# Altium PCB FPGA3 Panel.PcbDoc
Units mil, origin at the board's own origin, x right, y up, seen from the top; angles counter-clockwise.
Board outline 5000 x 9500 mil, 12 copper layers (TopLayer, Plane1, MidLayer1, Plane2, MidLayer2, Plane3, Plane4, MidLayer3, Plane5, MidLayer4, Plane6, BottomLayer), stack 58.89 mil thick; 8 components, 0 nets, 80 pads, 0 vias.
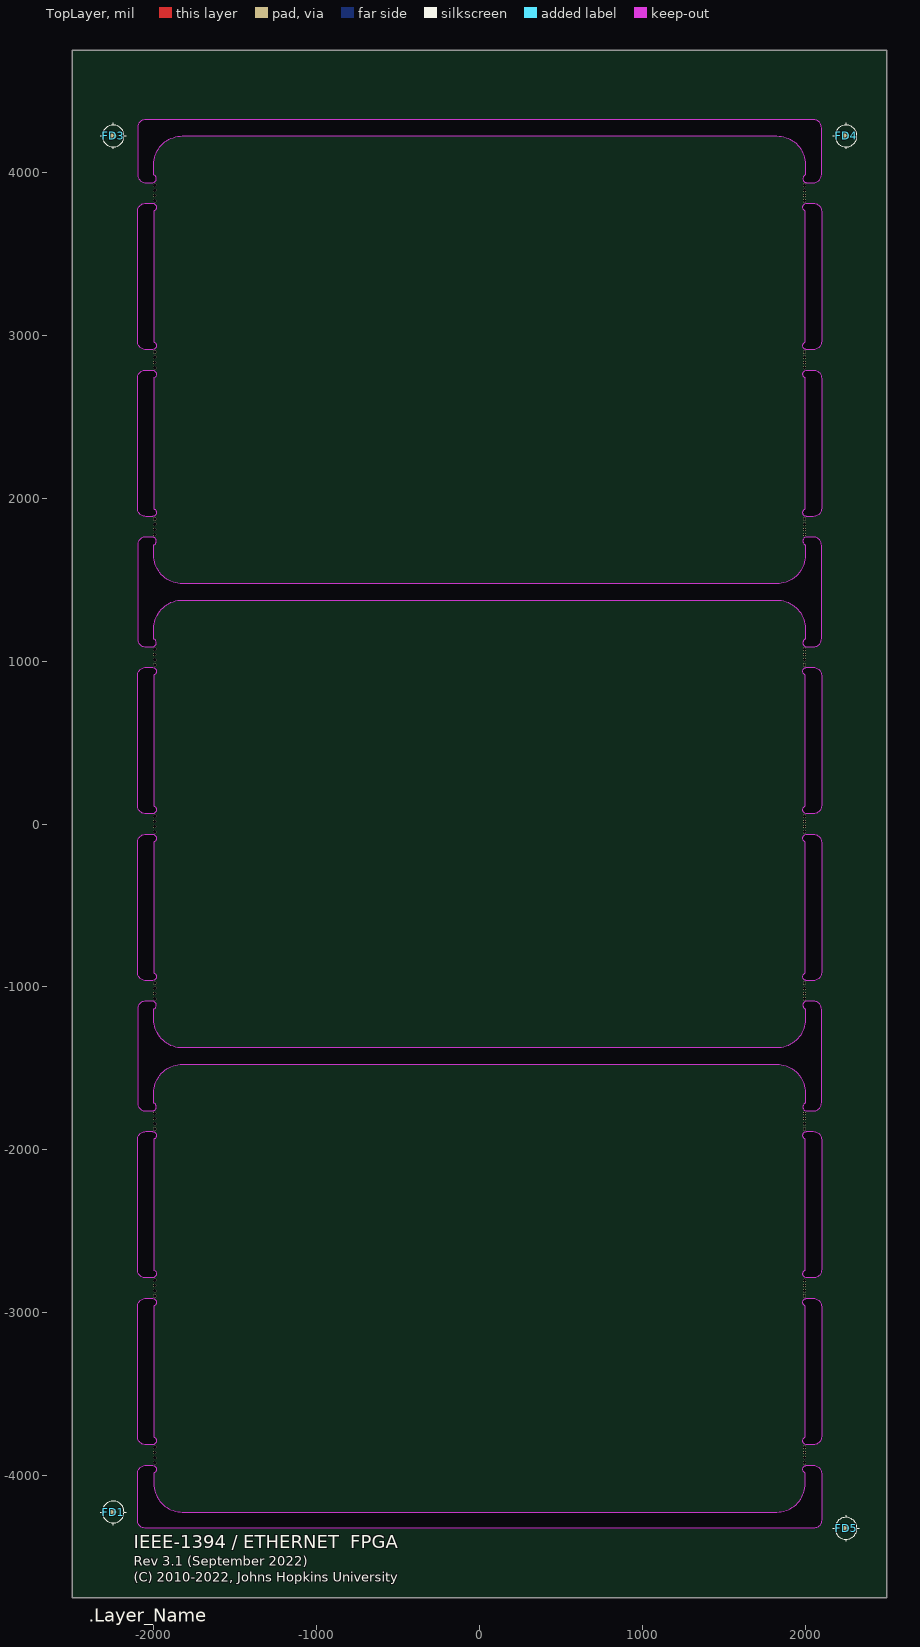
[diagram p0: TopLayer view]
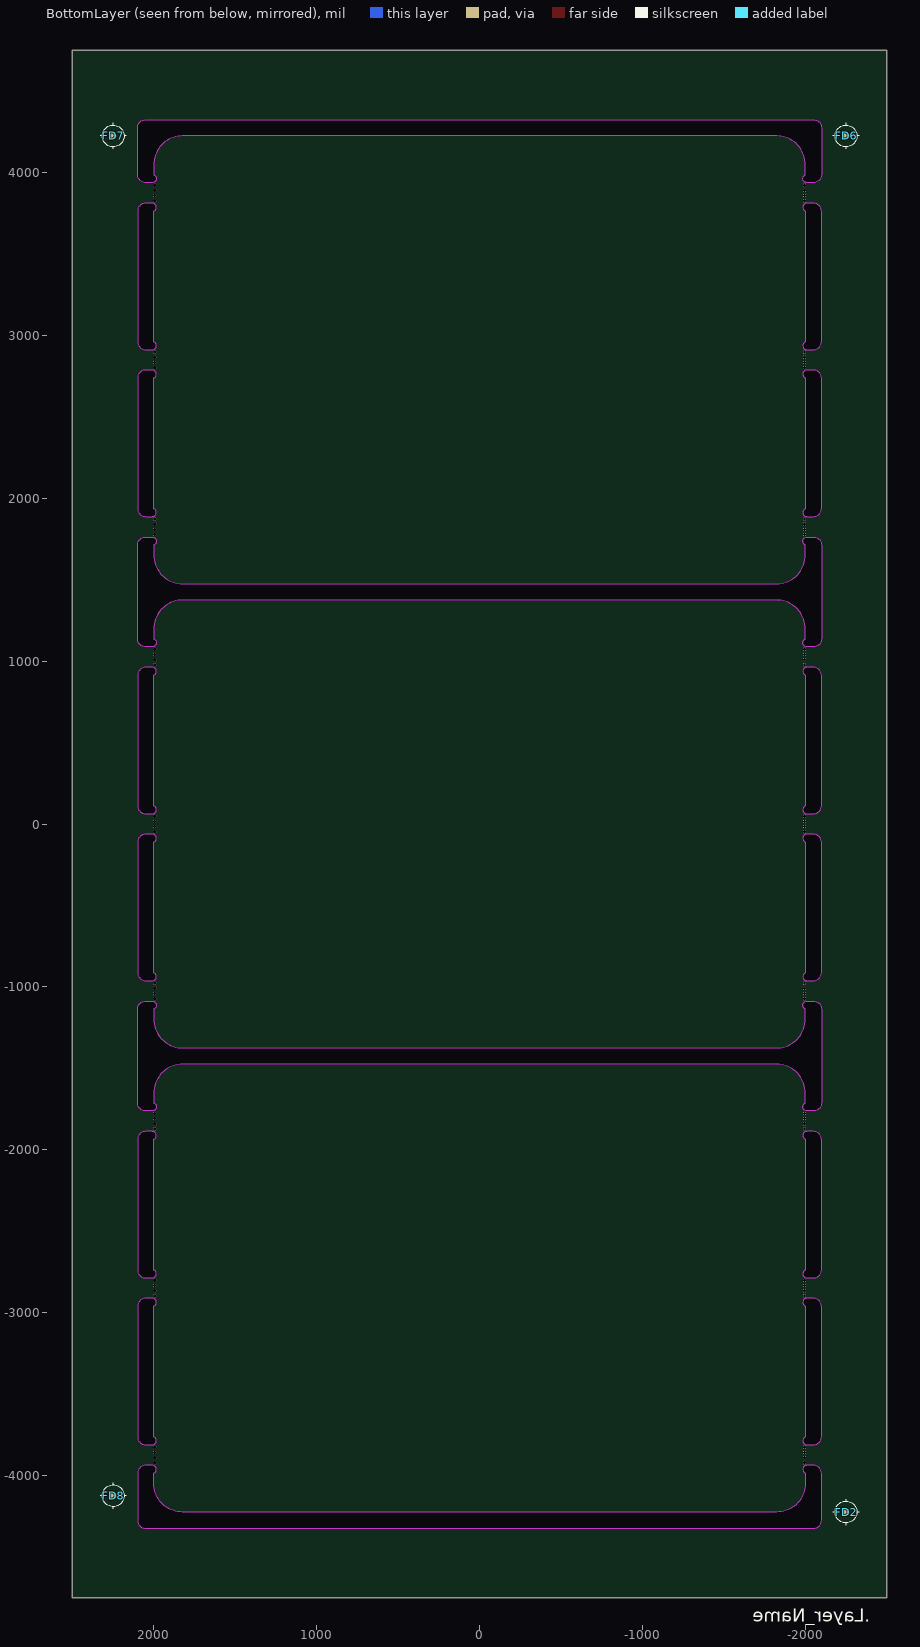
[diagram p1: BottomLayer view, seen from below]
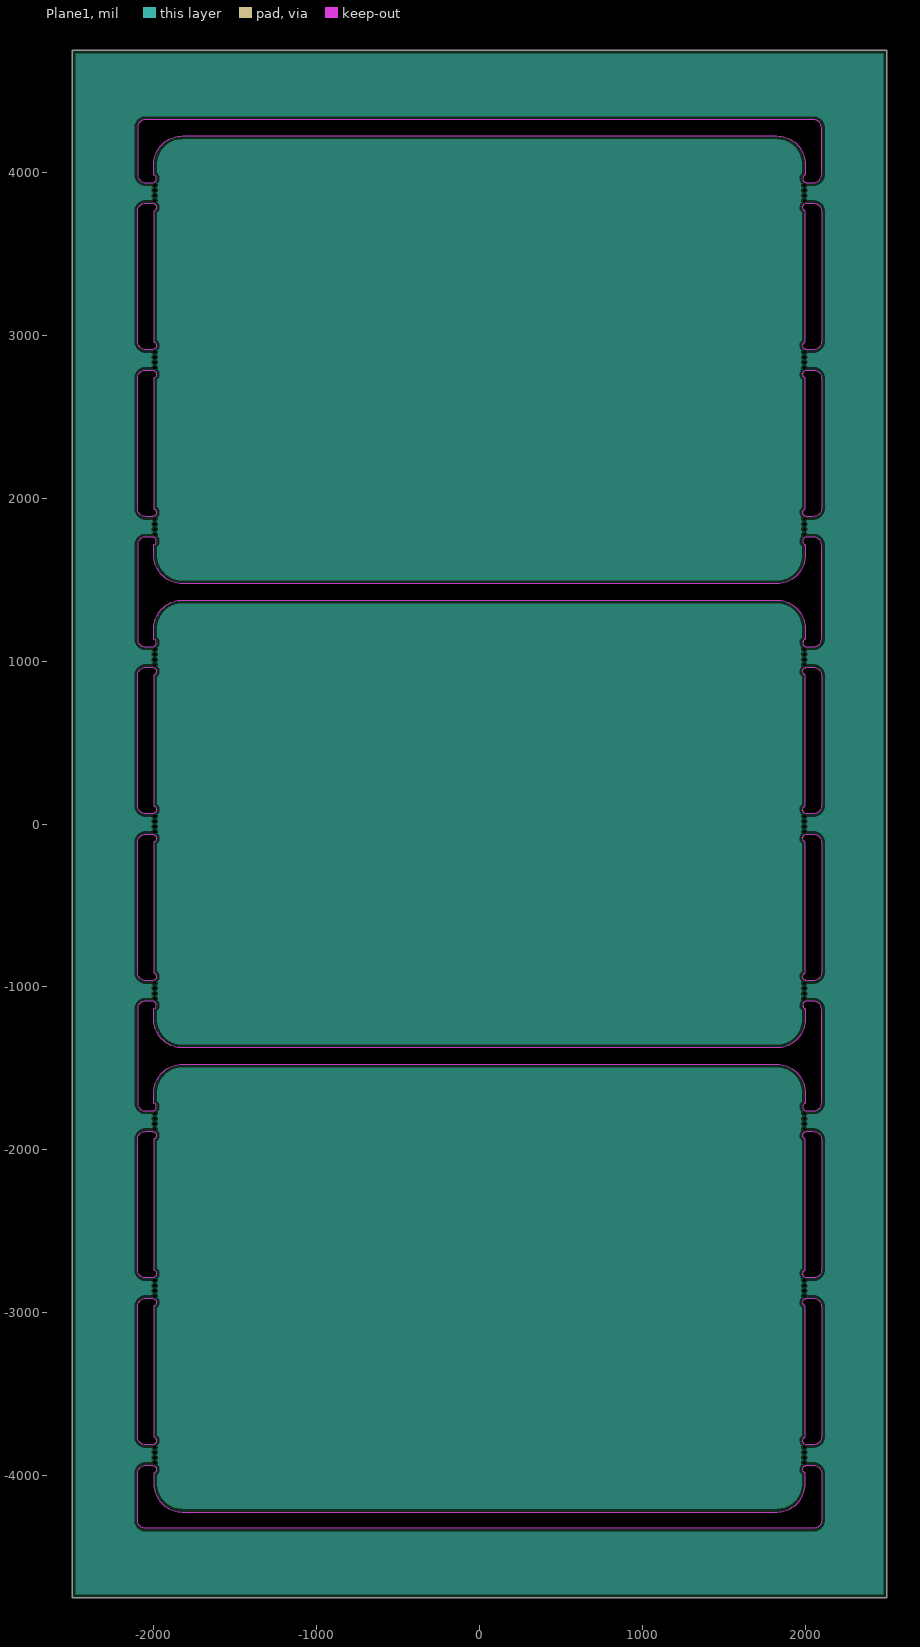
[diagram p2: Plane1, clearances drawn from the general rule]
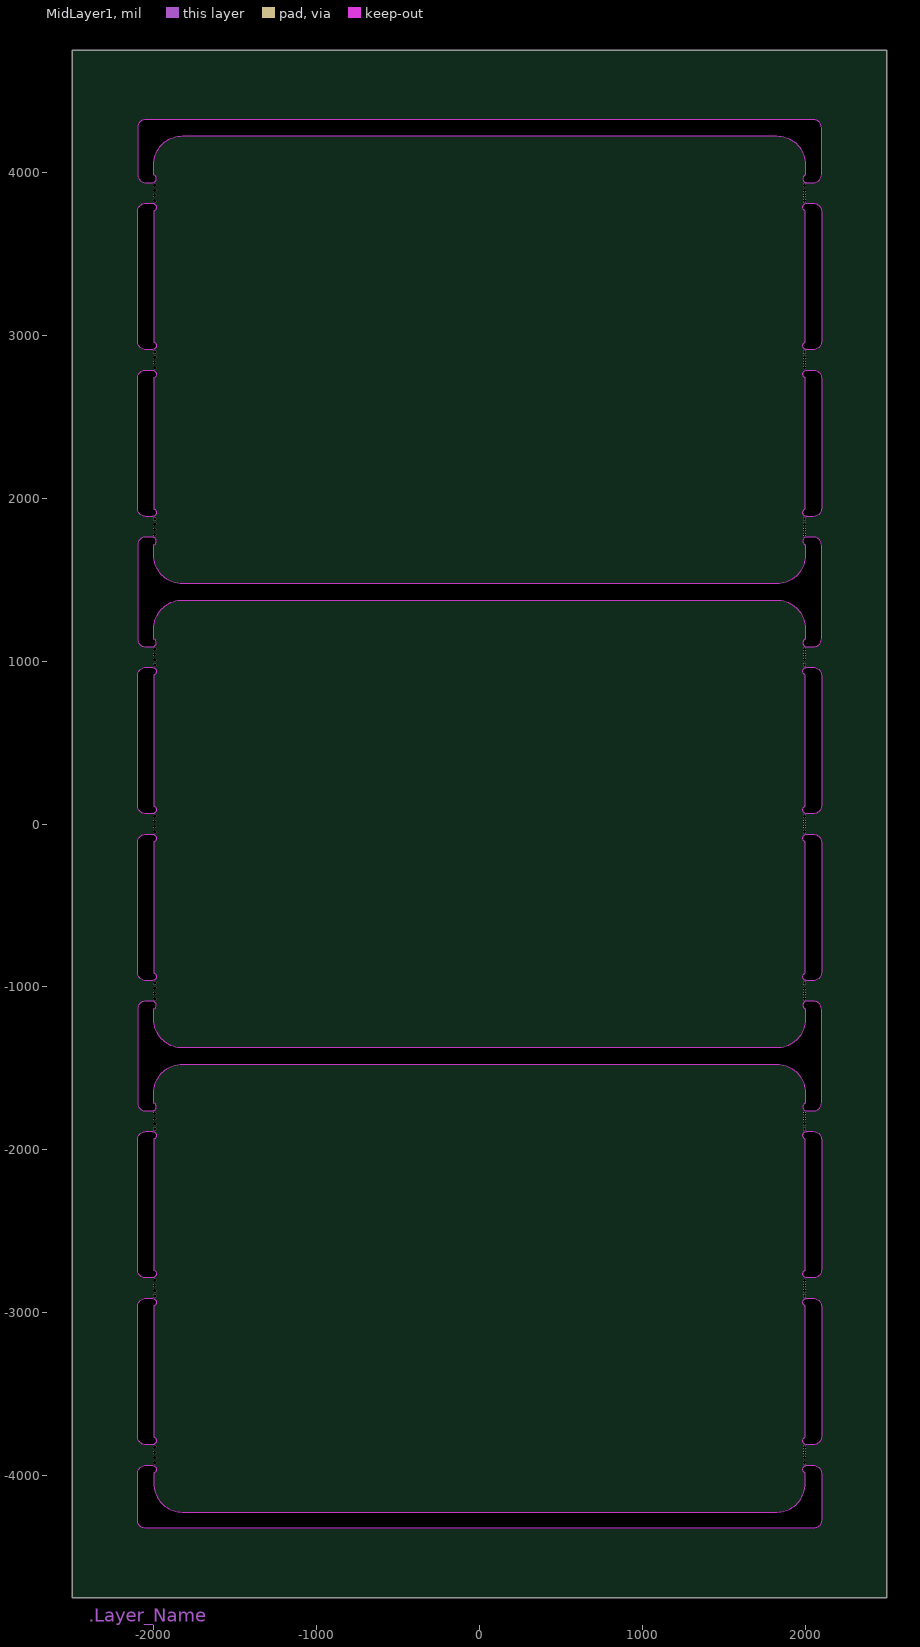
[diagram p3: MidLayer1]
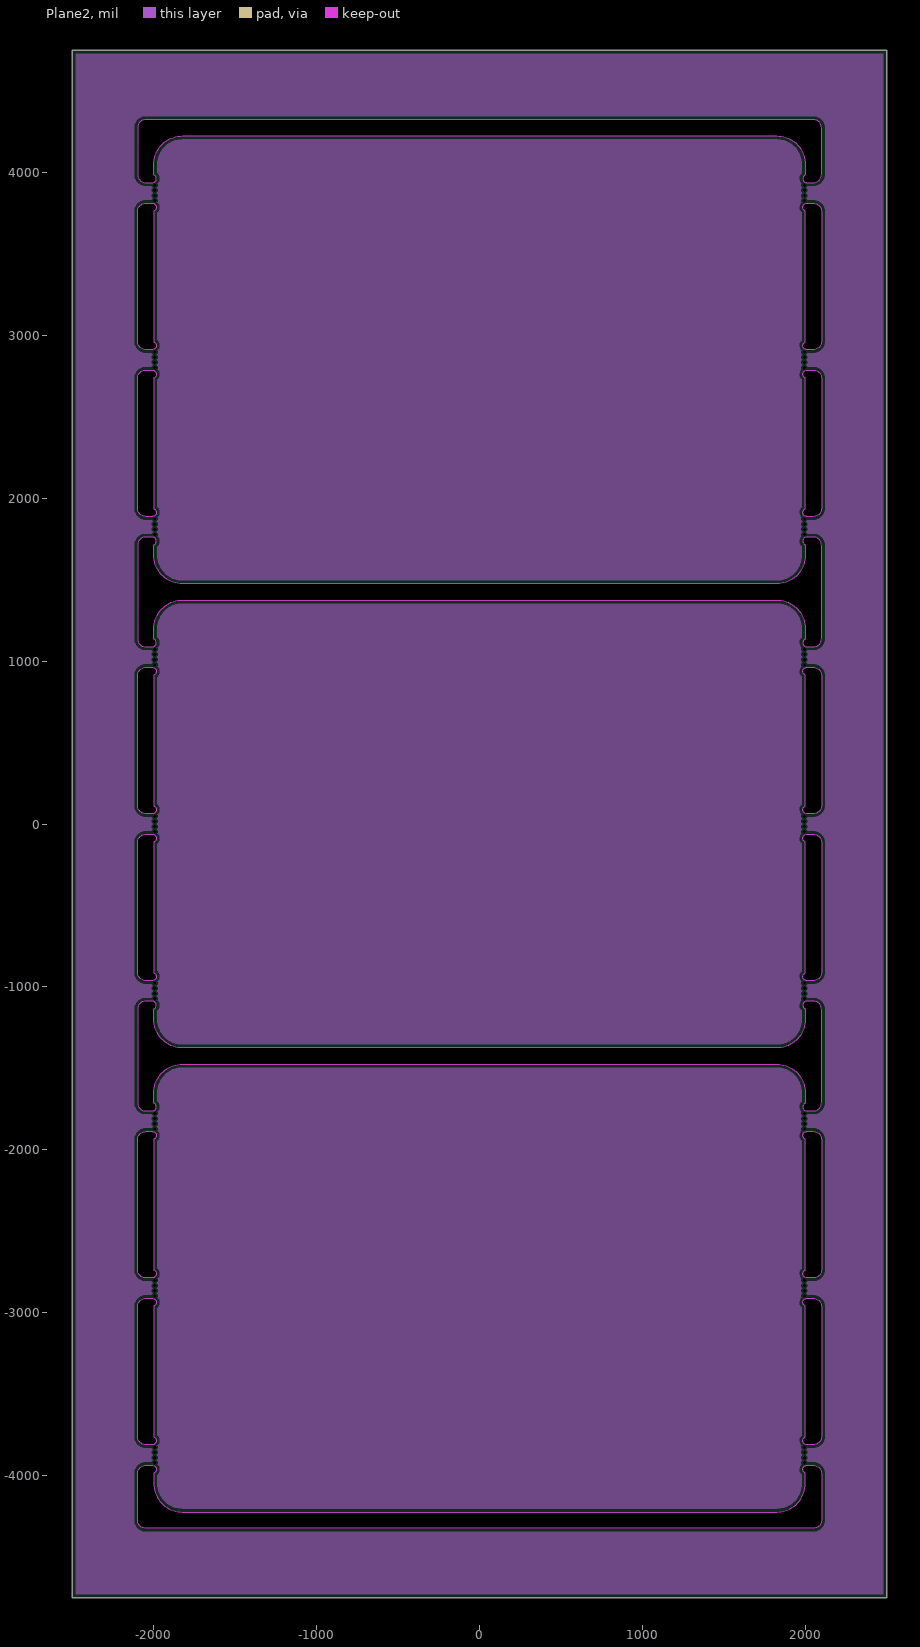
[diagram p4: Plane2, clearances drawn from the general rule]
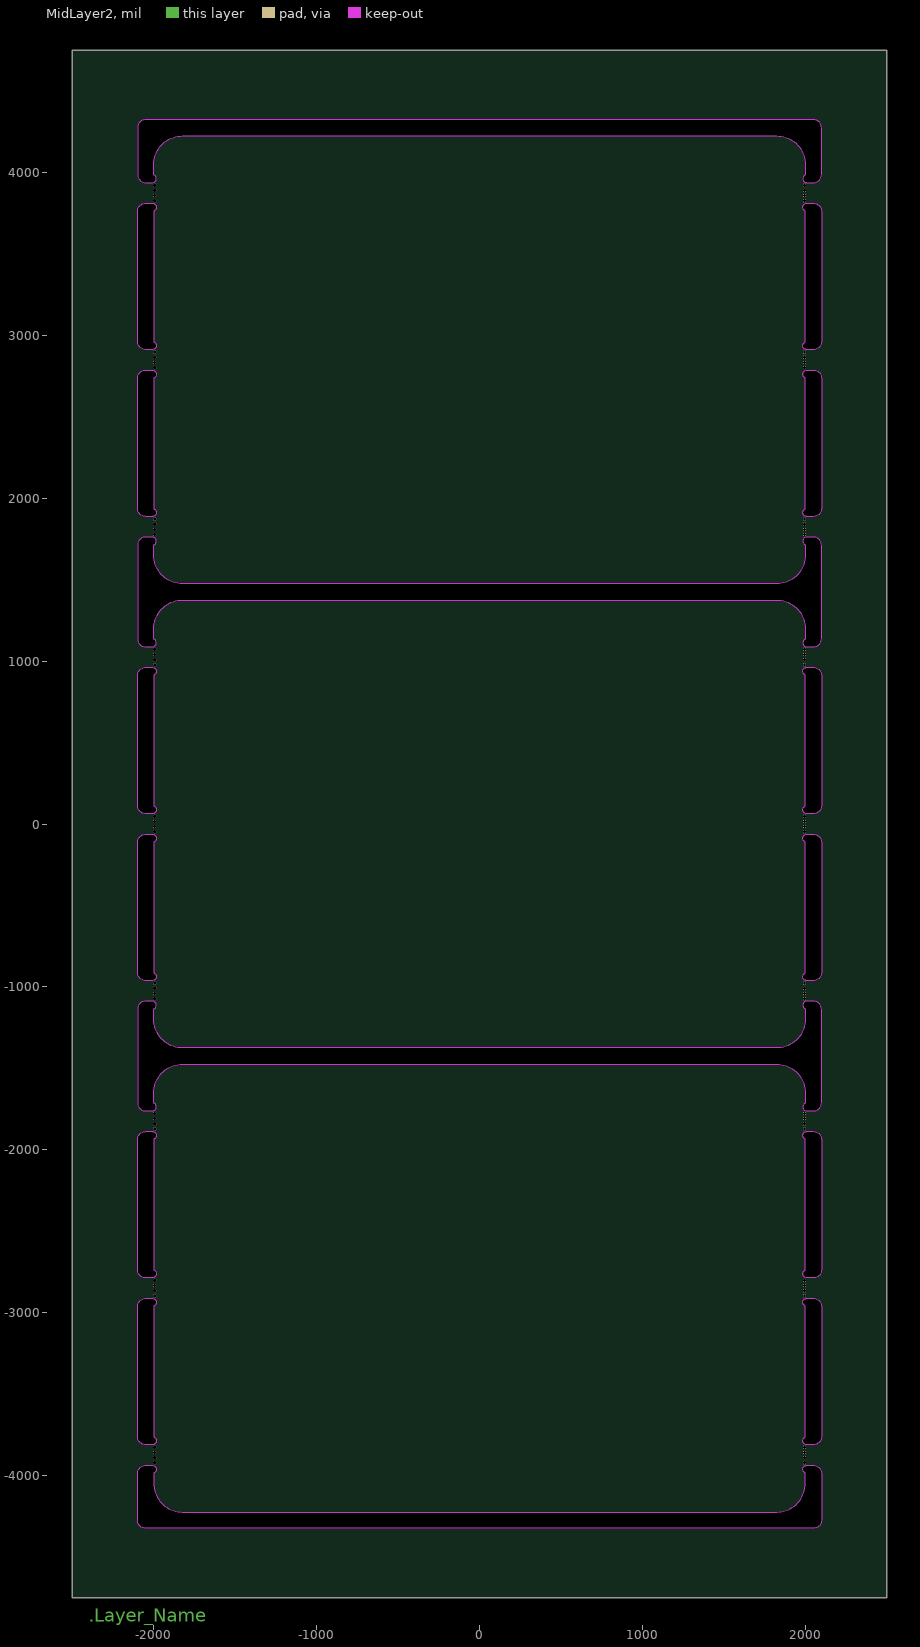
[diagram p5: MidLayer2]
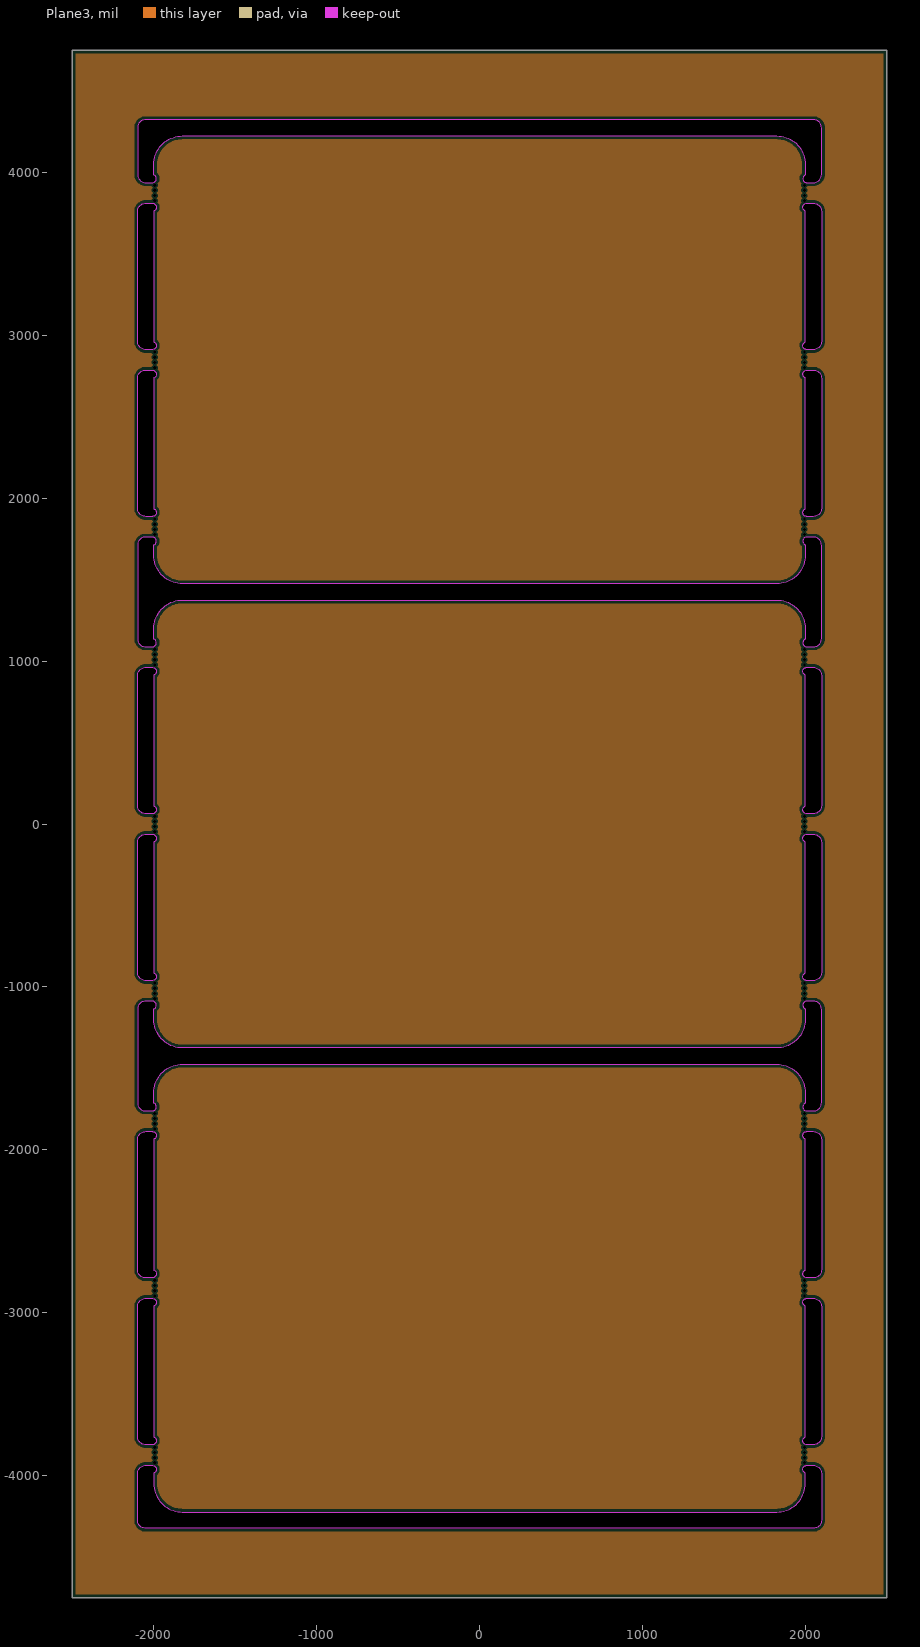
[diagram p6: Plane3, clearances drawn from the general rule]
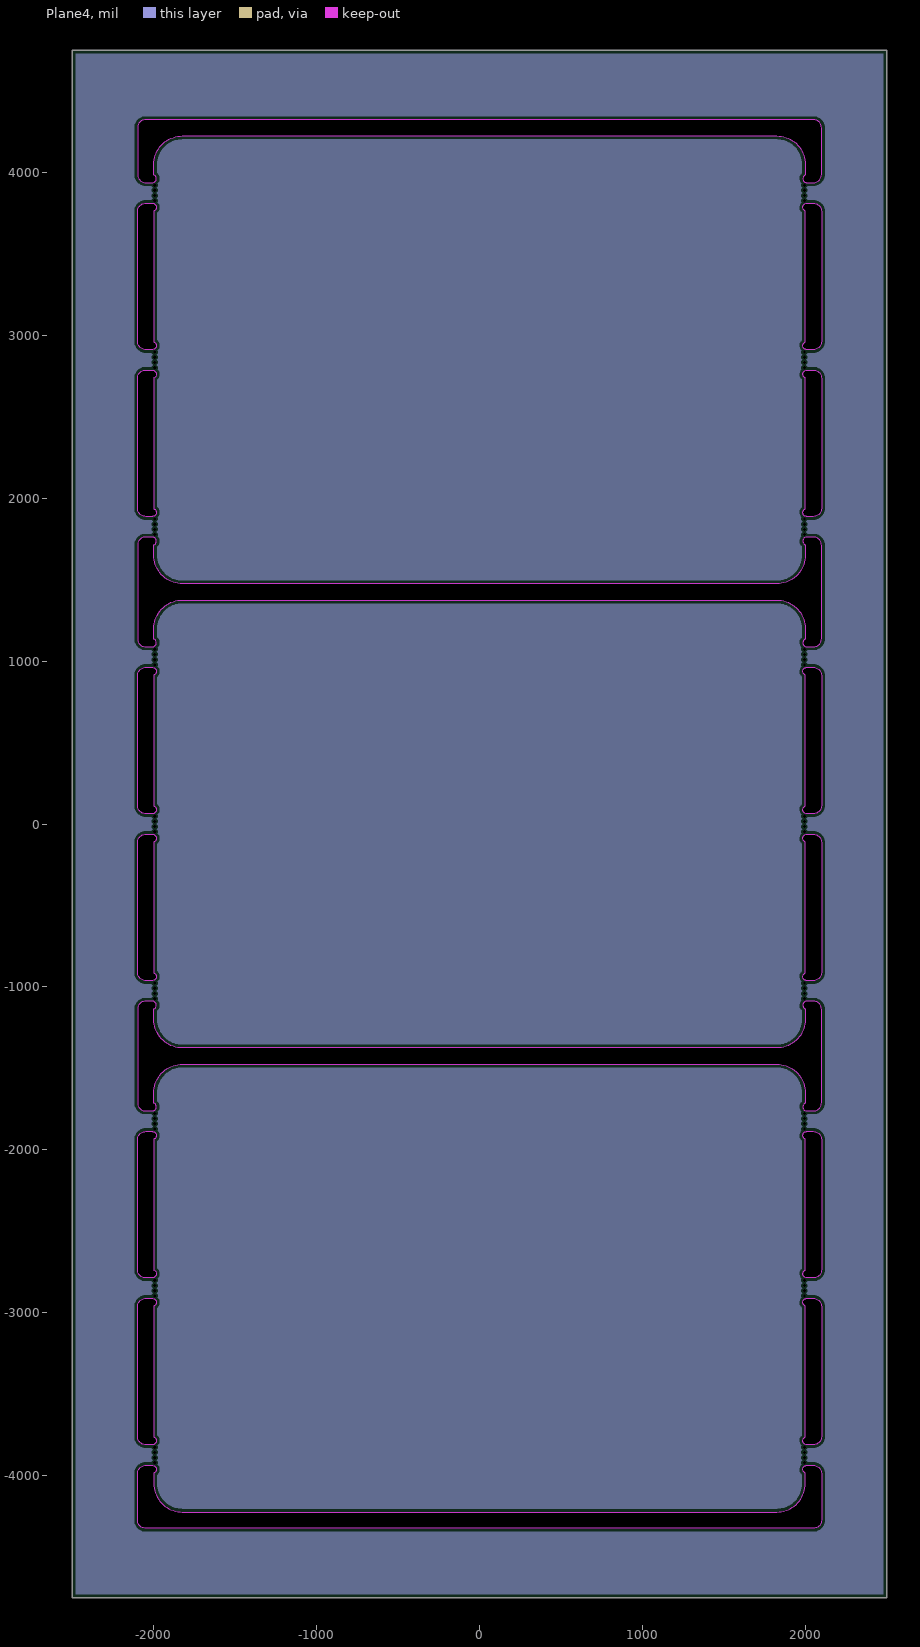
[diagram p7: Plane4, clearances drawn from the general rule]
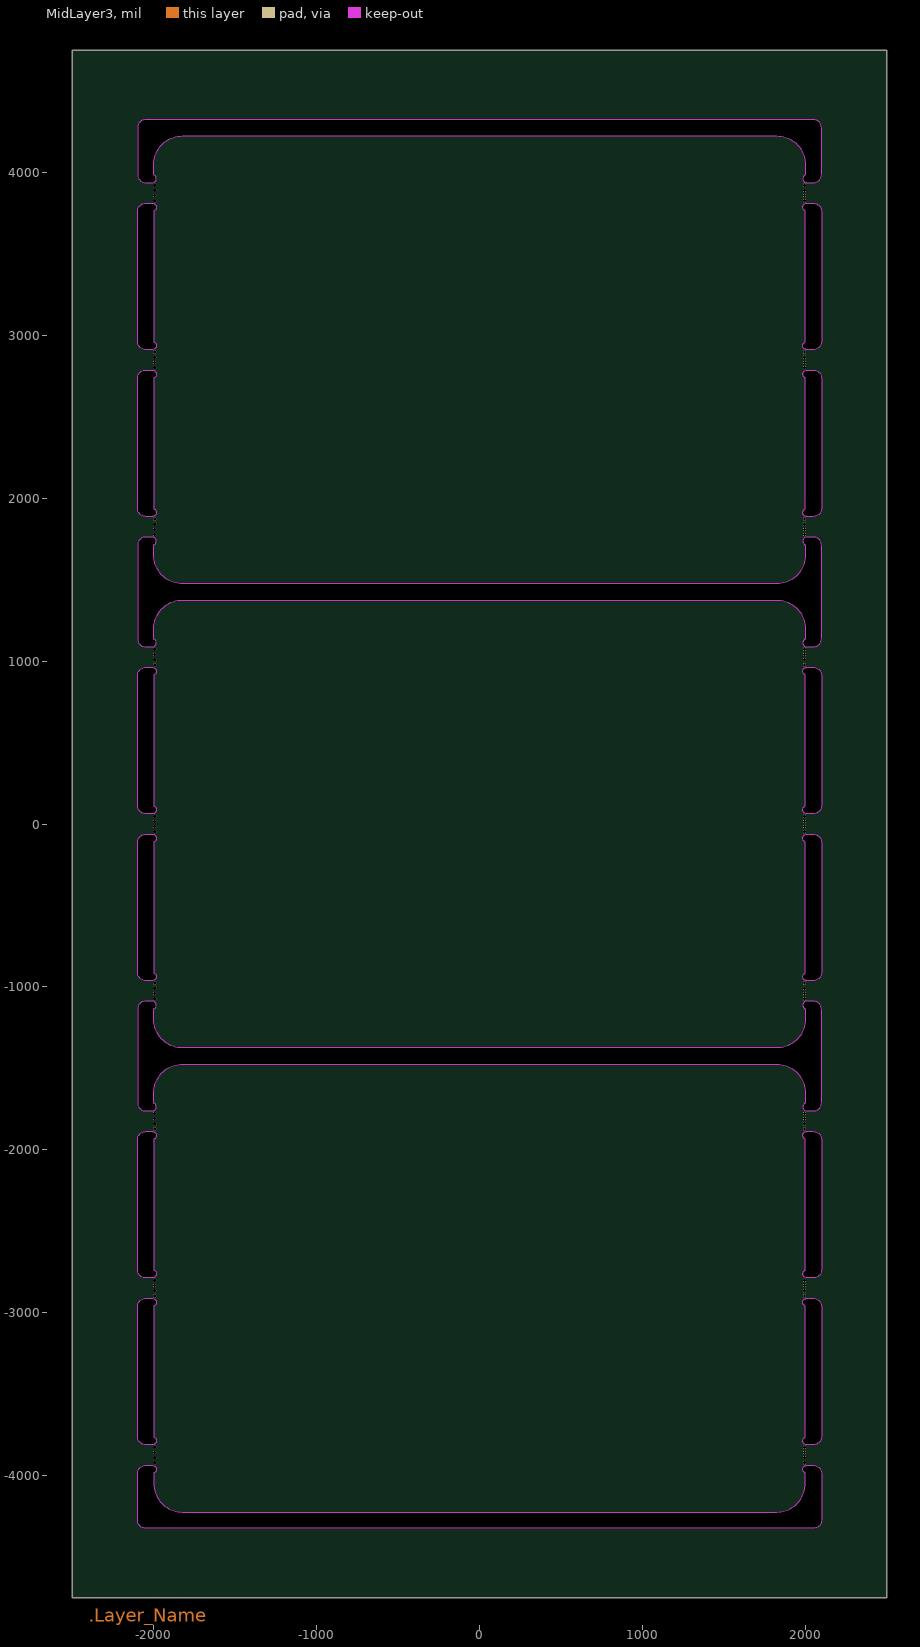
[diagram p8: MidLayer3]
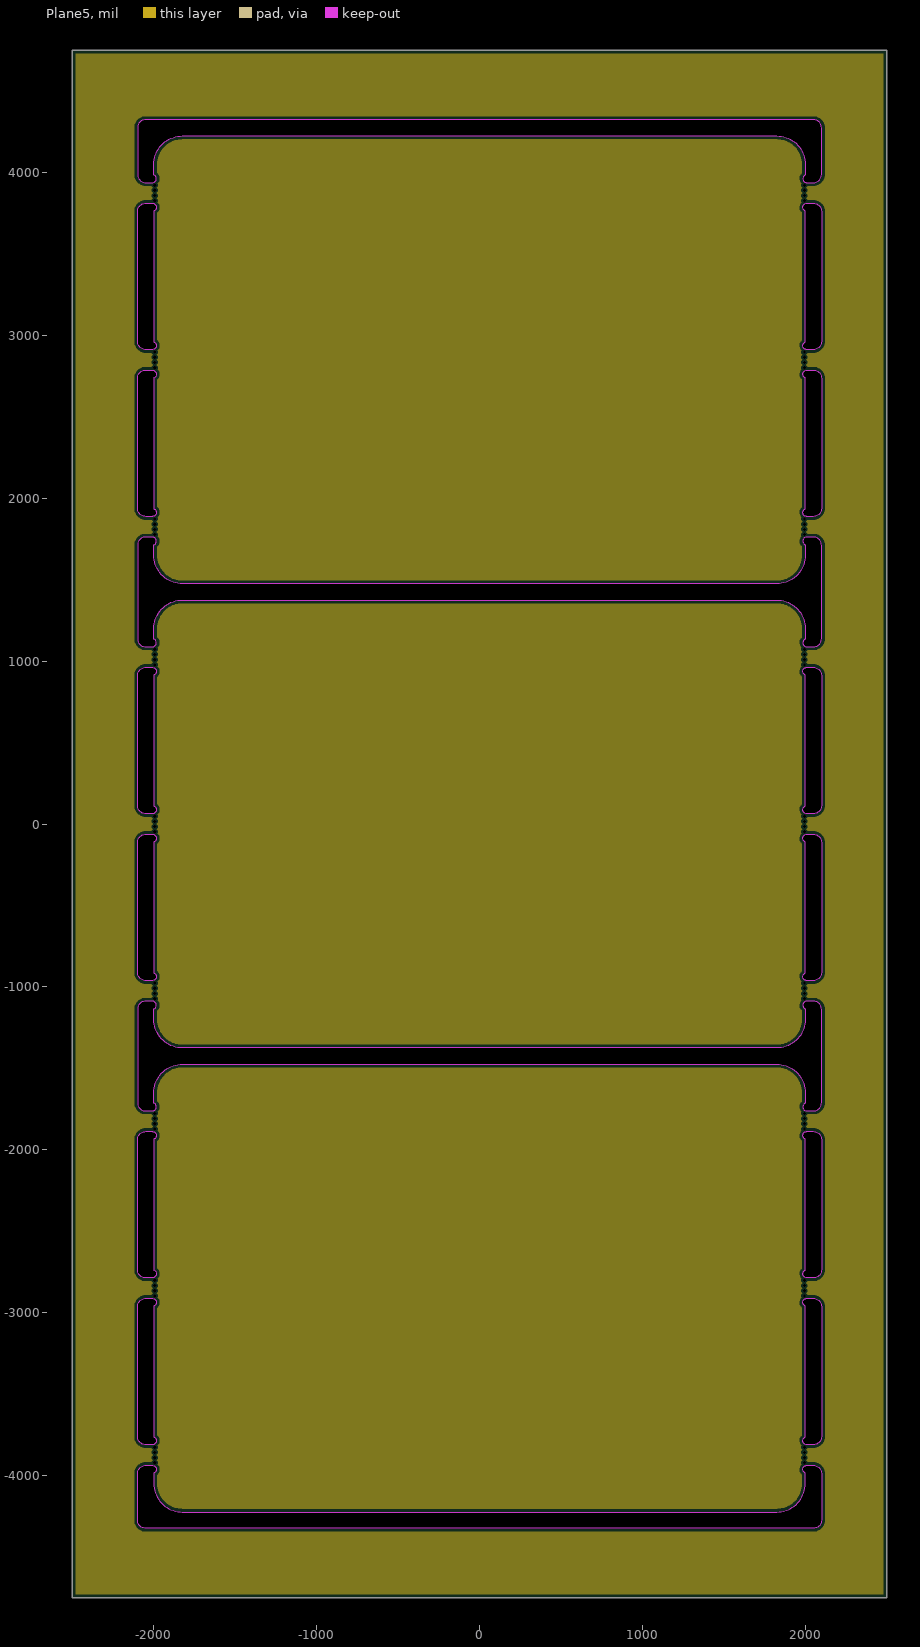
[diagram p9: Plane5, clearances drawn from the general rule]
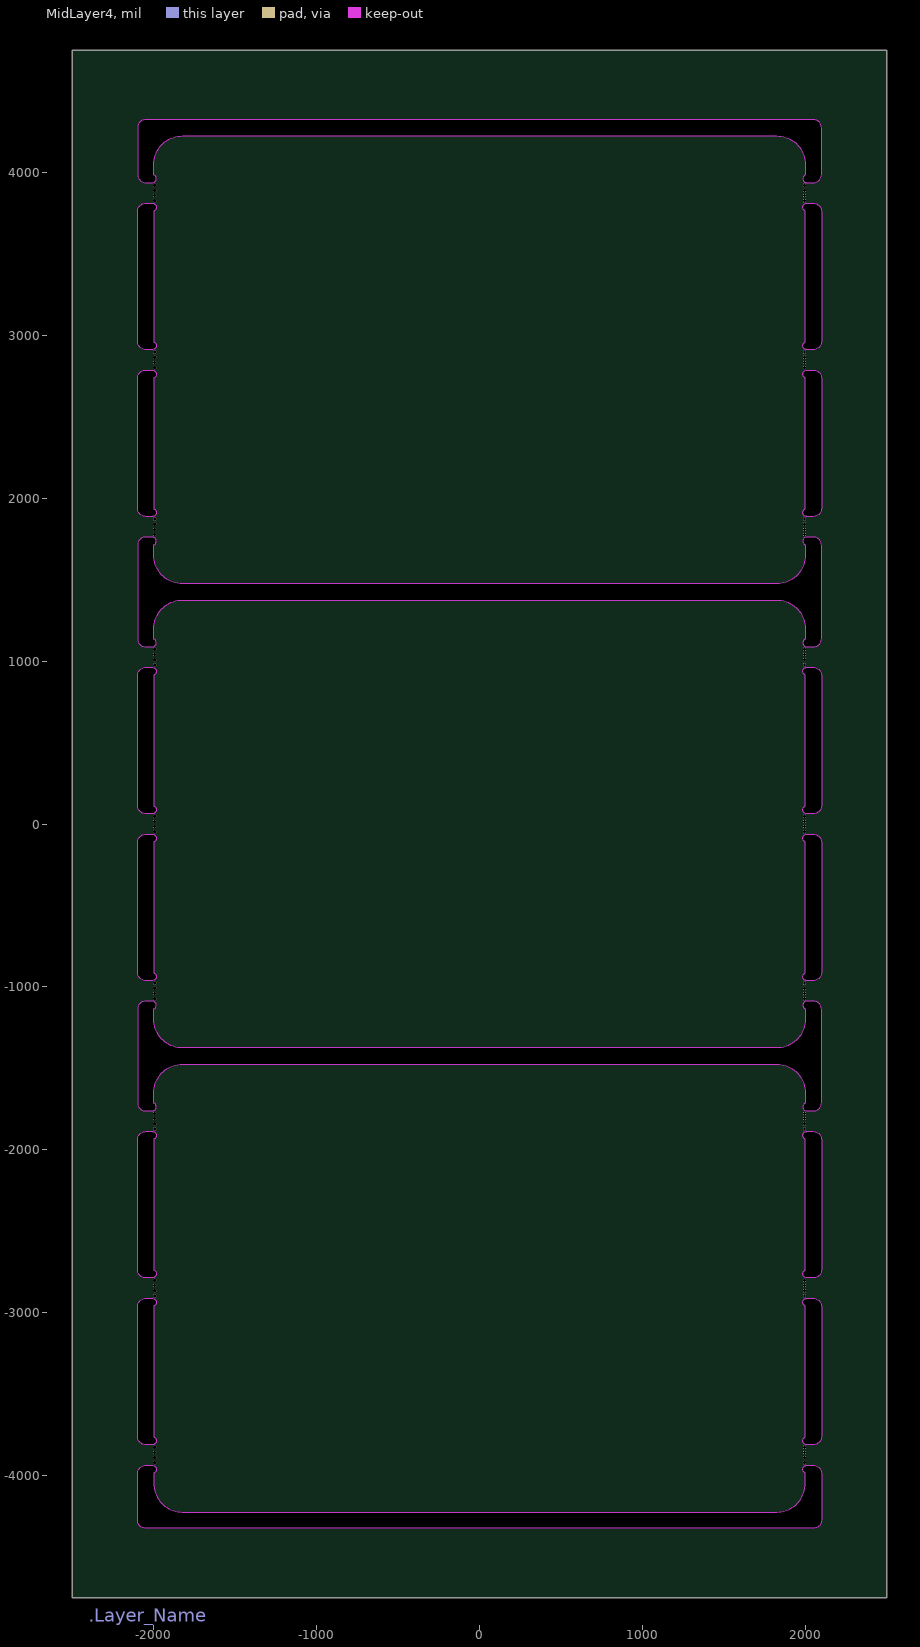
[diagram p10: MidLayer4]
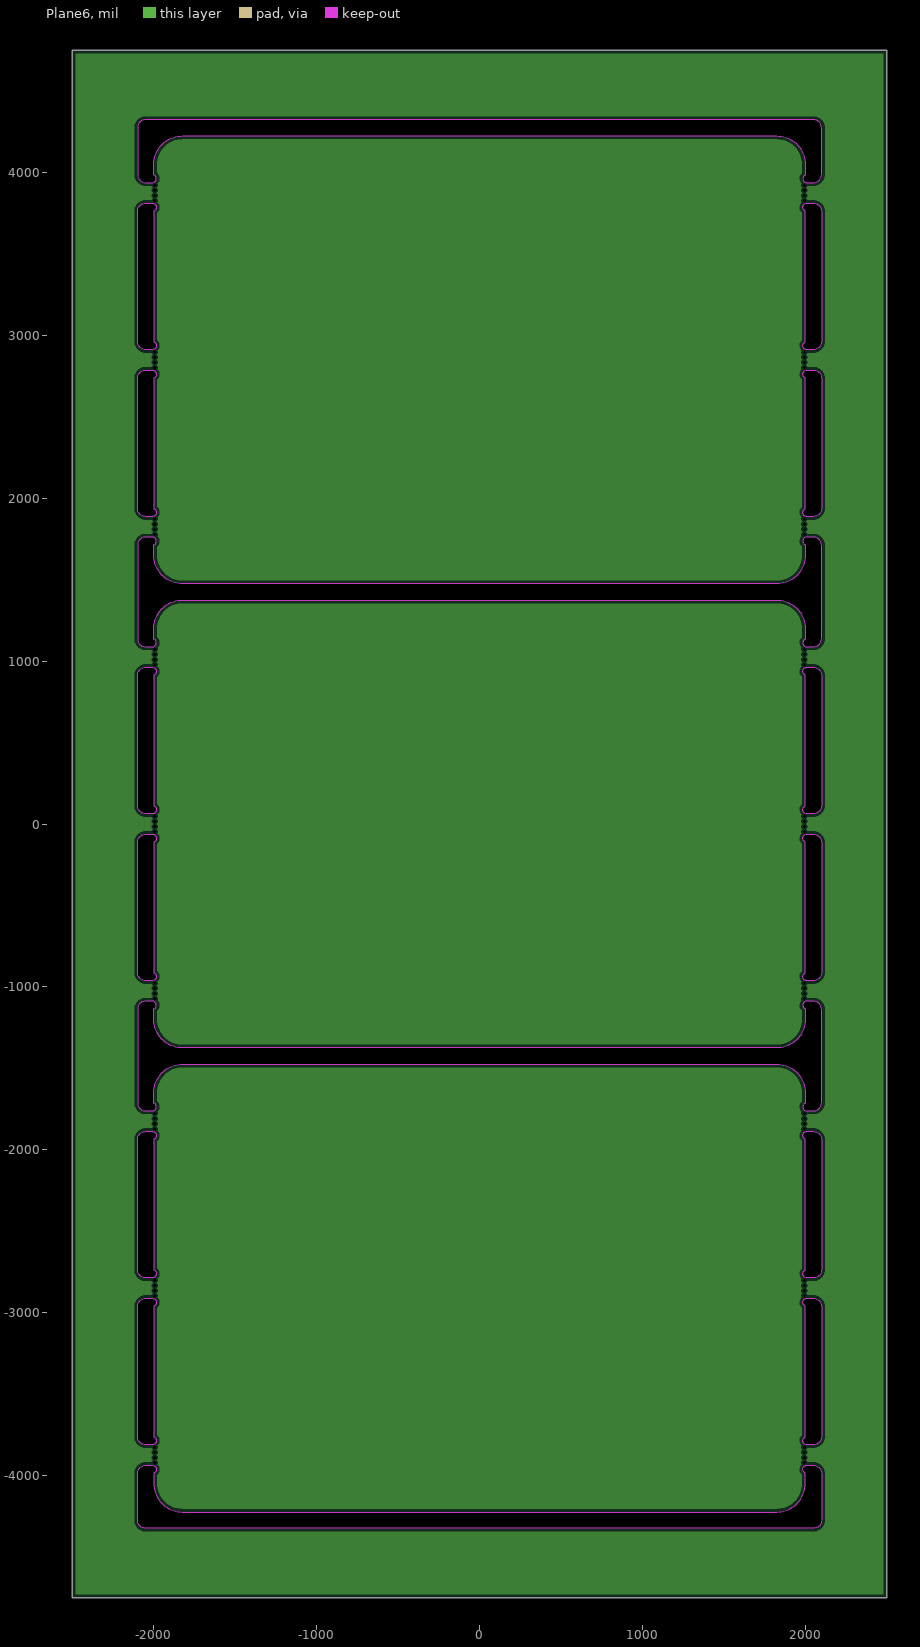
[diagram p11: Plane6, clearances drawn from the general rule]

## Layer stack, top to bottom
TopSolder: solder mask 0.4, Solder Resist, Dk 3.5
TopLayer: signal copper 1.9
Prepreg1: prepreg 2.3, PP-003, Dk 3.9
Plane1: plane copper 0.709
Core1: core 5, Core-015, Dk 4.4
MidLayer1: signal copper 0.709
Prepreg2: prepreg 4.6, PP-016, Dk 4.4
Plane2: plane copper 0.709
Core2: core 5, Core-015, Dk 4.4
MidLayer2: signal copper 0.709
Prepreg3: prepreg 4.6, PP-016, Dk 4.4
Plane3: plane copper 0.709
Core3: core 5, Core-015, Dk 4.4
Plane4: plane copper 0.709
Prepreg4: prepreg 4.6, PP-016, Dk 4.4
MidLayer3: signal copper 0.709
Core4: core 5, Core-015, Dk 4.4
Plane5: plane copper 0.709
Prepreg5: prepreg 4.6, PP-016, Dk 4.4
MidLayer4: signal copper 0.709
Core5: core 5, Core-015, Dk 4.4
Plane6: plane copper 0.709
Prepreg6: prepreg 2.3, PP-003, Dk 3.9
BottomLayer: signal copper 1.9
BottomSolder: solder mask 0.4, Solder Resist, Dk 3.5

## Board outline
-2500,-4750 -2500,4750 2500,4750 2500,-4750
cut-out: -2050,-1762 -2010,-1762 ccw(c-2010,-1737) -2000,-1714.09 -2000,-1650 cw(c-1825,-1650) -1825,-1475 1825,-1475 cw(c1825,-1650) 2000,-1650 2000,-1714.09 ccw(c2010,-1737) 2010,-1762 2050,-1762 ccw(c2050,-1712) 2100,-1712 2100,-1138 ccw(c2050,-1138) 2050,-1088 2010,-1088 ccw(c2010,-1113) 2000,-1135.91 2000,-1200 cw(c1825,-1200) 1825,-1375 -1825,-1375 cw(c-1825,-1200) -2000,-1200 -2000,-1135.91 ccw(c-2010,-1113) -2010,-1088 -2050,-1088 ccw(c-2050,-1138) -2100,-1138 -2100,-1712 ccw(c-2050,-1712)
cut-out: -2050,1088 -2010,1088 ccw(c-2010,1113) -2000,1135.91 -2000,1200 cw(c-1825,1200) -1825,1375 1825,1375 cw(c1825,1200) 2000,1200 2000,1135.91 ccw(c2010,1113) 2010,1088 2050,1088 ccw(c2050,1138) 2100,1138 2100,1712 ccw(c2050,1712) 2050,1762 2010,1762 ccw(c2010,1737) 2000,1714.09 2000,1650 cw(c1825,1650) 1825,1475 -1825,1475 cw(c-1825,1650) -2000,1650 -2000,1714.09 ccw(c-2010,1737) -2010,1762 -2050,1762 ccw(c-2050,1712) -2100,1712 -2100,1138 ccw(c-2050,1138)
cut-out: -2050,3938 -2010,3938 ccw(c-2010,3963) -2000,3985.91 -2000,4050 cw(c-1825,4050) -1825,4225 1825,4225 cw(c1825,4050) 2000,4050 2000,3985.91 ccw(c2010,3963) 2010,3938 2050,3938 ccw(c2050,3988) 2100,3988 2100,4275 ccw(c2050,4275) 2050,4325 -2050,4325 ccw(c-2050,4275) -2100,4275 -2100,3988 ccw(c-2050,3988)
cut-out: -2050,-4325 cw(c-2050,-4275) -2100,-4275 -2100,-3988 cw(c-2050,-3988) -2050,-3938 -2010,-3938 cw(c-2010,-3963) -2000,-3985.91 -2000,-4050 ccw(c-1825,-4050) -1825,-4225 1825,-4225 ccw(c1825,-4050) 2000,-4050 2000,-3985.91 cw(c2010,-3963) 2010,-3938 2050,-3938 cw(c2050,-3988) 2100,-3988 2100,-4275 cw(c2050,-4275) 2050,-4325
cut-out: 2010,2913 cw(c2010,2938) 2000,2960.91 2000,3764.09 cw(c2010,3787) 2010,3812 2050,3812 cw(c2050,3762) 2100,3762 2100,2963 cw(c2050,2963) 2050,2913
cut-out: 2000,1935.92 2000,2739.09 cw(c2010,2762) 2010,2787 2050,2787 cw(c2050,2737) 2100,2737 2100,1938 cw(c2050,1938) 2050,1888 2010,1888 cw(c2010,1913)
cut-out: 2000,110.91 2000,914.09 cw(c2010,937) 2010,962 2050,962 cw(c2050,912) 2100,912 2100,113 cw(c2050,113) 2050,63 2010,63 cw(c2010,88)
cut-out: -2100,113 -2100,912 cw(c-2050,912) -2050,962 -2010,962 cw(c-2010,937) -2000,914.09 -2000,110.91 cw(c-2010,88) -2010,63 -2050,63 cw(c-2050,113)
cut-out: -2050,-962 cw(c-2050,-912) -2100,-912 -2100,-113 cw(c-2050,-113) -2050,-63 -2010,-63 cw(c-2010,-88) -2000,-110.91 -2000,-914.08 cw(c-2010,-937) -2010,-962
cut-out: 2000,-914.08 2000,-110.91 cw(c2010,-88) 2010,-63 2050,-63 cw(c2050,-113) 2100,-113 2100,-912 cw(c2050,-912) 2050,-962 2010,-962 cw(c2010,-937)
cut-out: 2010,-2787 cw(c2010,-2762) 2000,-2739.09 2000,-1935.92 cw(c2010,-1913) 2010,-1888 2050,-1888 cw(c2050,-1938) 2100,-1938 2100,-2737 cw(c2050,-2737) 2050,-2787
cut-out: 2000,-3764.09 2000,-2960.92 cw(c2010,-2938) 2010,-2913 2050,-2913 cw(c2050,-2963) 2100,-2963 2100,-3762 cw(c2050,-3762) 2050,-3812 2010,-3812 cw(c2010,-3787)
cut-out: -2050,-2787 cw(c-2050,-2737) -2100,-2737 -2100,-1938 cw(c-2050,-1938) -2050,-1888 -2010,-1888 cw(c-2010,-1913) -2000,-1935.92 -2000,-2739.09 cw(c-2010,-2762) -2010,-2787
cut-out: -2100,-3762 -2100,-2963 cw(c-2050,-2963) -2050,-2913 -2010,-2913 cw(c-2010,-2938) -2000,-2960.92 -2000,-3764.09 cw(c-2010,-3787) -2010,-3812 -2050,-3812 cw(c-2050,-3762)
cut-out: -2050,1888 cw(c-2050,1938) -2100,1938 -2100,2737 cw(c-2050,2737) -2050,2787 -2010,2787 cw(c-2010,2762) -2000,2739.09 -2000,1935.92 cw(c-2010,1913) -2010,1888
cut-out: -2100,2963 -2100,3762 cw(c-2050,3762) -2050,3812 -2010,3812 cw(c-2010,3787) -2000,3764.09 -2000,2960.91 cw(c-2010,2938) -2010,2913 -2050,2913 cw(c-2050,2963)

## Design rules (kind name [scope] priority, off if disabled: settings)
Clearance "BGA Breakout" [TouchesRoom('Breakout')] p1: gap=4.2 ignorepadtopadclearanceinfootprint=FALSE
Clearance PolyClearPas [InPoly vs IsPadHoleValid] p2: gap=20 ignorepadtopadclearanceinfootprint=FALSE except(0: Arc-Hole Track-Hole SMDPad-Hole THPad-Hole Via-Hole Fill-Hole Poly-Hole Region-Hole Text-Hole)
Clearance PolyClear [InPoly] p3: gap=12 ignorepadtopadclearanceinfootprint=FALSE except(0: Arc-Hole Track-Hole SMDPad-Hole THPad-Hole Via-Hole Fill-Hole Poly-Hole Region-Hole Text-Hole)
Clearance [All] p4: gap=5 ignorepadtopadclearanceinfootprint=FALSE
ComponentClearance [All] p1 off: gap=10 collisioncheckmode=3 verticalgap=10 showdistances=FALSE
FabricationTestPointUsage TestPointUsage [All] p1: valid=0 allowmultiple=FALSE
FabricationTestpoint Testpoint [All] p1: side=3 testpointundercomponent=TRUE minsize=40 maxsize=100 preferedsize=60 minholesize=0 maxholesize=40 preferedholesize=32 testpointgrid=1 allowsidetop=TRUE allowsidebottom=TRUE usegrid=TRUE gridtolerance=0.01
Height [All] p1 off: minheight=0 maxheight=1000 prefheight=500
HoleSize [All] p1: absolutevalues=TRUE maxlimit=250 minlimit=8 maxpercent=80.000 minpercent=20.000
HoleToHoleClearance [All] p1 off: gap=10 allowstackedmicrovias=TRUE
LayerPairs [All] p1 off: enforce=TRUE
MinimumSolderMaskSliver [All] p1 off: minsoldermaskwidth=10
NetAntennae [All] p1 off: netantennaetolerance=0
PlaneClearance PlaneClearanceVIA [AsMils(Hole)<10] p1: clearance=8.5
PlaneClearance PlaneClearance25 [AsMils(Hole)>50] p2: clearance=25
PlaneClearance PlaneClearance12 [AsMils(Hole)>16] p3: clearance=12
PlaneClearance PlaneClearance10 [All] p4: clearance=10
PlaneConnect PlaneNoConnect [InNet('GND') And OnLayer('Plane2') And (AsMils(Hole)>10) And (AsMils(Hole)<100)] p1: planeconnectstyle=NoConnect reliefexpansion=20 reliefentries=4 reliefconductorwidth=10 reliefairgap=10
PlaneConnect PlaneDirect [(AsMils(Hole)<15) Or (AsMils(Hole)>100)] p2: planeconnectstyle=Direct reliefexpansion=20 reliefentries=4 reliefconductorwidth=10 reliefairgap=10
PlaneConnect [All] p3: planeconnectstyle=Relief reliefexpansion=20 reliefentries=4 reliefconductorwidth=10 reliefairgap=10
PolygonConnect PolygonConnect_2 [All vs IsSMTPin] p1: connectstyle=NoConnect reliefconductorwidth=10 reliefentries=4 polygonreliefangle="90 Angle" airgapwidth=10
PolygonConnect PolygonConnect_1 [All vs (AsMils(Hole)<12) Or (AsMils(Hole)>70)] p2: connectstyle=Direct reliefconductorwidth=10 reliefentries=4 polygonreliefangle="90 Angle" airgapwidth=10
PolygonConnect [All] p3: connectstyle=NoConnect reliefconductorwidth=10 reliefentries=4 polygonreliefangle="90 Angle" airgapwidth=10
RoutingVias [All] p1: holewidth=10 width=20 viastyle="Through Hole" minholewidth=8 minwidth=18 maxholewidth=10 maxwidth=20
SilkToSilkClearance [All] p1 off: silktosilkclearance=10
SilkToSolderMaskClearance SilkscreenOverComponentPads [IsPad] p1 off: minsilkscreentomaskgap=10 clearancetoexposedcopper=TRUE
SolderMaskExpansion [All] p1: expansion=4 istentingtop=FALSE
Width WidthENET [InNetClass('DIFF100')] p1: maxlimit=10 minlimit=5.2 preferedwidth=10 toplayer_maxwidth=6 toplayer_prefwidth=6 midlayer1_minwidth=10 midlayer2_minwidth=10 midlayer3_minwidth=10 midlayer4_minwidth=10 bottomlayer_minwidth=10 minimp=50.000000 maximp=50.000000 favimp=50.000000
Width WidthBreakout [TouchesRoom('Breakout')] p2: maxlimit=100 minlimit=4.2 preferedwidth=5
Width [All] p3: maxlimit=250 minlimit=5 preferedwidth=6
17 further rules are at their usual default settings.

## Components (designator, comment, footprint, x,y, rotation, side; value= is the part's Value field where it differs from the comment)
FD1 "FD" FD -2250,-4225 r270 top
FD2 "FD" FD -2250,-4225 r180 bottom
FD3 "FD" FD -2250,4225 r0 top
FD4 "FD" FD 2250,4225 r0 top
FD5 "FD" FD 2250,-4325 r0 top
FD6 "FD" FD -2250,4225 r180 bottom
FD7 "FD" FD 2250,4225 r180 bottom
FD8 "FD" FD 2250,-4125 r180 bottom

## Footprints (in the part's own frame and the unit in brackets; to place one, negate y for a bottom-side part, rotate by r counter-clockwise, add the part's x,y. Pads: shape width x height; smd on the part's side, far side on the other; paste and mask are expansions set on the pad)
FD [mil]
  round 40 smd: 0(0,0)
  silkscreen extent -67,-80 80,80

## Free pads (board coordinates)
  round 20 hole 20 unplated: 0(-1995,-3859) 0(-1995,-2834) 0(-1995,-1809) 0(-1995,-1009) 0(-1995,16) 0(-1995,1041) 0(-1995,1841) 0(-1995,2866) 0(-1995,3891) 0(1995,-3859) 0(1995,-2834) 0(1995,-1809) 0(1995,-1009) 0(1995,16) 0(1995,1041) 0(1995,1841) 0(1995,2866) 0(1995,3891) 1(-1995,-3891) 1(-1995,-3827) 1(-1995,-2866) 1(-1995,-2802) 1(-1995,-1841) 1(-1995,-1777) 1(-1995,-1041) 1(-1995,-977) 1(-1995,-16) 1(-1995,48) 1(-1995,1009) 1(-1995,1073) 1(-1995,1809) 1(-1995,1873) 1(-1995,2834) 1(-1995,2898) 1(-1995,3859) 1(-1995,3923) 1(-1995,-3923) 1(-1995,-2898) 1(-1995,-1873) 1(-1995,-1073) 1(-1995,-48) 1(-1995,977) 1(-1995,1777) 1(-1995,2802) 1(-1995,3827) 1(1995,-3923) 1(1995,-2898) 1(1995,-1873) 1(1995,-1073) 1(1995,-48) 1(1995,977) 1(1995,1777) 1(1995,2802) 1(1995,3827) 1(1995,-3891) 1(1995,-3827) 1(1995,-2866) 1(1995,-2802) 1(1995,-1841) 1(1995,-1777) 1(1995,-1041) 1(1995,-977) 1(1995,-16) 1(1995,48) 1(1995,1009) 1(1995,1073) 1(1995,1809) 1(1995,1873) 1(1995,2834) 1(1995,2898) 1(1995,3859) 1(1995,3923)

## Nets (pads, with @x,y where several pads share a name; then routed paths per layer and width w, separated by ;. In a path a pad name is that pad's centre, name@x,y a point inside that pad or via, vN(x,y) a via of type N, cw(c..) or ccw(c..) an arc to the next point about the centre after c; other vN are vias at no path point)
pads on no net: FD1.0 FD2.0 FD3.0 FD4.0 FD5.0 FD6.0 FD7.0 FD8.0

## Polygon pours and split planes (outlines as drawn)
no net on Plane1 (split plane): 2479.9,-4729.9 -2479.9,-4729.9 -2479.9,4729.9 2479.9,4729.9
no net on Plane2 (split plane): 2479.9,-4729.9 -2479.9,-4729.9 -2479.9,4729.9 2479.9,4729.9
no net on Plane3 (split plane): 2479.9,-4729.9 -2479.9,-4729.9 -2479.9,4729.9 2479.9,4729.9
no net on Plane4 (split plane): 2479.9,-4729.9 -2479.9,-4729.9 -2479.9,4729.9 2479.9,4729.9
no net on Plane5 (split plane): 2479.9,-4729.9 -2479.9,-4729.9 -2479.9,4729.9 2479.9,4729.9
no net on Plane6 (split plane): 2479.9,-4729.9 -2479.9,-4729.9 -2479.9,4729.9 2479.9,4729.9

## Other copper
TopLayer:
  text ".Layer_Name" at -2400,-4900 h80
MidLayer1:
  text ".Layer_Name" at -2400,-4900 h80
MidLayer2:
  text ".Layer_Name" at -2400,-4900 h80
MidLayer3:
  text ".Layer_Name" at -2400,-4900 h80
MidLayer4:
  text ".Layer_Name" at -2400,-4900 h80
BottomLayer:
  text ".Layer_Name" at -2400,-4900 h80
Plane6 (plane layer: these items are gaps in the copper):
  text ".Layer_Name" at -2400,-4900 h80
Plane3 (plane layer: these items are gaps in the copper):
  text ".Layer_Name" at -2400,-4900 h80
Plane4 (plane layer: these items are gaps in the copper):
  text ".Layer_Name" at -2400,-4900 h80
Plane5 (plane layer: these items are gaps in the copper):
  text ".Layer_Name" at -2400,-4900 h80
Plane1 (plane layer: these items are gaps in the copper):
  text ".Layer_Name" at -2400,-4900 h80
Plane2 (plane layer: these items are gaps in the copper):
  text ".Layer_Name" at -2400,-4900 h80

## Silkscreen, mask and mechanical layers (free items; w line width, h text height)
TopOverlay:
  text "IEEE-1394 / ETHERNET  FPGA" at -2125,-4475 h140
  text "Rev 3.1 (September 2022)" at -2125,-4575 h100
  text "(C) 2010-2022, Johns Hopkins University" at -2125,-4675 h100
  text ".Layer_Name" at -2400,-4900 h80
BottomOverlay:
  text ".Layer_Name" at -2400,-4900 h80
Top Paste:
  text ".Layer_Name" at -212.43,-4566.66 h50
Bottom Paste:
  text ".Layer_Name / (Viewed From The Bottom Side)" at 697.28,-4626.98 h50
TopSolder:
  text ".Layer_Name" at -2400,-4900 h80
BottomSolder:
  text ".Layer_Name" at -2400,-4900 h80
Mechanical 1:
  the board outline again, w5
Mechanical 2:
  rectangle: 205,-1700 305,-1678.74
  rectangle: -1320,-2503 -1300,-2453
  rectangle: -1605,-2475 -1585,-2425
  rectangle: -705,-2247 -685,-2197
  rectangle: -705,-2325.79 -685,-2275.79
  rectangle: 225,-3420 245,-3370
  rectangle: -910,-4100 -890,-4050
  region: 260,-3140 260,-3120 210,-3120 210,-3140
  region: 961,-2145 961,-2125 911,-2125 911,-2145
  region: 230,-2000 230,-1980 180,-1980 180,-2000
  rectangle: -510,-3775 -490,-3725
  lines w4: -918,-4086 -918,-4112 -882,-4112 -882,-4086 ; -918,-4064 -918,-4038 -882,-4038 -882,-4064
  lines w10: -1425,-4600 -1425,-4175 2300,-4175 ; -1425,-4470 525,-4470 ; 525,-4600 525,-4175 ; -2300,-4600 2300,-4600 2300,-1150 -2300,-1150 -2300,-4600
  text "Top Assembly Drawing" at -1225,-1400 h250
  text "NOTE:" at -2175,-4000 h125
  text "1)" at -2075,-4100 h100
  text "Components of symbol" at -1950,-4100 h100
  text "are one of C101-162 and have the same values (0.1uF cap. in 0402)." at -825,-4100 h100
  text "Title:" at -1375,-4275 h100
  text "Johns Hopkins University" at 575,-4325 h150
  text "IEEE-1394/Ethernet FPGA" at -1275,-4400 h150
  text "Laboratory for Computational" at 650,-4450 h100
  text "Sensing and Robotics" at 650,-4550 h100
  text "Date:" at -1375,-4565 h100
  text ".Print_Date" at -1100,-4565 h100
  text "Rev:" at 0,-4565 h100
  text "2.1" at 275,-4565 h100
Mechanical 3:
  rectangle: 1015,-2640 1035,-2590
  rectangle: 1060,-2520 1080,-2470
  rectangle: 929,-2394 949,-2344
  rectangle: 670,-2441.5 690,-2391.5
  rectangle: 675,-2585 695,-2535
  region: 880,-2571 880,-2551 830,-2551 830,-2571
  region: 909,-2345 909,-2325 859,-2325 859,-2345
  region: 1247,-2482.5 1247,-2462.5 1197,-2462.5 1197,-2482.5
  region: 1247,-2587.5 1247,-2567.5 1197,-2567.5 1197,-2587.5
  region: -12.8,-2125.98 -12.8,-2105.98 -62.8,-2105.98 -62.8,-2125.98
  region: 65.94,-2125.98 65.94,-2105.98 15.94,-2105.98 15.94,-2125.98
  region: 223.42,-2135.98 223.42,-2115.98 173.42,-2115.98 173.42,-2135.98
  region: 380.91,-2125.98 380.91,-2105.98 330.91,-2105.98 330.91,-2125.98
  region: 223.42,-2254.09 223.42,-2234.09 173.42,-2234.09 173.42,-2254.09
  region: 65.94,-2254.09 65.94,-2234.09 15.94,-2234.09 15.94,-2254.09
  region: 223.43,-2362.2 223.43,-2342.2 173.43,-2342.2 173.43,-2362.2
  region: 302.17,-2411.57 302.17,-2391.57 252.17,-2391.57 252.17,-2411.57
  region: 380.91,-2519.68 380.91,-2499.68 330.91,-2499.68 330.91,-2519.68
  region: 262.79,-2716.54 262.79,-2696.54 212.79,-2696.54 212.79,-2716.54
  region: 302.16,-2805.28 302.16,-2785.28 252.16,-2785.28 252.16,-2805.28
  region: 65.94,-2874.65 65.94,-2854.65 15.94,-2854.65 15.94,-2874.65
  region: 65.94,-2765.91 65.94,-2745.91 15.94,-2745.91 15.94,-2765.91
  region: 65.63,-2647.48 65.63,-2627.48 15.63,-2627.48 15.63,-2647.48
  region: 26.57,-2519.68 26.57,-2499.68 -23.43,-2499.68 -23.43,-2519.68
  region: -249.02,-2519.69 -249.02,-2499.69 -299.02,-2499.69 -299.02,-2519.69
  region: -249.02,-2755.91 -249.02,-2735.91 -299.02,-2735.91 -299.02,-2755.91
  rectangle: -239.65,-2106.61 -219.65,-2056.61
  rectangle: -328.39,-2342.83 -308.39,-2292.83
  rectangle: -170.91,-2342.83 -150.91,-2292.83
  rectangle: -52.8,-2421.57 -32.8,-2371.57
  rectangle: 75.31,-2382.2 95.31,-2332.2
  rectangle: 75.31,-2500.31 95.31,-2450.31
  rectangle: 75,-2579.37 95,-2529.37
  rectangle: 232.8,-2618.43 252.8,-2568.43
  rectangle: 390.28,-2618.43 410.28,-2568.43
  rectangle: 505,-2401.89 525,-2351.89
  rectangle: 509.68,-2264.09 529.68,-2214.09
  rectangle: 505,-2677.48 525,-2627.48
  rectangle: 505,-2834.96 525,-2784.96
  rectangle: 114.68,-2736.54 134.68,-2686.54
  rectangle: -52.48,-2697.48 -32.48,-2647.48
  rectangle: -121.54,-2618.43 -101.54,-2568.43
  rectangle: -160.91,-2500.32 -140.91,-2450.32
  rectangle: -240.28,-2657.8 -220.28,-2607.8
  rectangle: -1218,-2266.73 -1198,-2216.73
  rectangle: -1255,-2385 -1235,-2335
  rectangle: -805,-2345 -785,-2295
  rectangle: -805,-2266.73 -785,-2216.73
  region: -975,-2210 -975,-2190 -1025,-2190 -1025,-2210
  region: 223.43,-2490.31 223.43,-2470.31 173.43,-2470.31 173.43,-2490.31
  region: -170.28,-2923.39 -170.28,-2903.39 -220.28,-2903.39 -220.28,-2923.39
  region: 223.11,-2923.07 223.11,-2903.07 173.11,-2903.07 173.11,-2923.07
  region: 400.59,-2920 400.59,-2900 350.59,-2900 350.59,-2920
  region: 910,-4050 890,-4050 890,-4100 910,-4100
  lines w4: 882,-4086 882,-4112 918,-4112 918,-4086 ; 882,-4064 882,-4038 918,-4038 918,-4064
  lines w10: -2300,-4175 1425,-4175 1425,-4600 ; -525,-4600 -525,-4175 ; -525,-4470 1425,-4470 ; -2300,-4600 -2300,-1150 2300,-1150 2300,-4600 -2300,-4600
  text "Bottom Assembly Drawing" at 1475,-1400 h250
  text "NOTE:" at 2175,-4000 h125
  text "are one of C101-162 and have the same values (0.1uF cap. in 0402)." at 825,-4100 h100
  text "Components of symbol" at 1950,-4100 h100
  text "1)" at 2075,-4100 h100
  text "Title:" at 1375,-4275 h100
  text "Johns Hopkins University" at -575,-4325 h150
  text "IEEE-1394/Ethernet FPGA" at 1275,-4400 h150
  text "Laboratory for Computational" at -650,-4450 h100
  text "Sensing and Robotics" at -650,-4550 h100
  text "2.1" at -275,-4565 h100
  text "Rev:" at 0,-4565 h100
  text ".Print_Date" at 1100,-4565 h100
  text "Date:" at 1375,-4565 h100
Mechanical 5:
  drawing of 180 lines, arcs and shapes, not listed
Drill Drawing:
  circle w25: c2960,180 r12
  circle w25: c2960,55 r12
  circle w25: c2960,1155 r12
  circle w25: c2960,1280 r12
  circle w25: c2960,1505 r12
  circle w25: c2960,1030 r12
  lines w8: 2425,1000 2375,1025 ; 2425,1050 2375,1025 ; 2900,1025 2375,1025
  lines w10: 2725,-5100 2725,-4525 6450,-4525 ; 2725,-4950 6450,-4950 ; 2725,-4820 4675,-4820 ; 4675,-4950 4675,-4525 ; 5825,-5100 5825,-4950
  lines w15: 2707.5,2793.79 5371.53,2793.79 ; 2707.5,4347.48 5371.53,4347.48 ; 3129.34,2638.42 3129.34,4502.85 ; 3544.78,2638.42 3544.78,4502.85 ; 3986.41,2638.42 3986.41,4502.85 ; 4309.97,2638.42 4309.97,4502.85 ; 4778.38,2638.42 4778.38,4502.85 ; 6450,375 6450,-5100 ; 6450,-5100 6450,5250 -2900,5250 -2900,-5100 6450,-5100 ; 2707.5,2638.42 5371.53,2638.42 5371.53,4502.85 2707.5,4502.85 2707.5,2638.42
  text "Drill Legend:" at 2625,4750 h200
  text "Symbol" at 2800.72,4394.09 h90
  text "Count" at 3175.95,4394.09 h90
  text "Hole Size" at 3591.39,4394.09 h90
  text "Plated" at 4033.02,4394.09 h90
  text "Hole Type" at 4356.58,4394.09 h90
  text "Hole Length" at 4824.99,4394.09 h90
  text "Slot -- Must Be Cut Out" at -425,4250 h80
  text "3693" at 3175.95,4238.72 h75
  text "8.0mil" at 3591.39,4238.72 h75
  text "PTH" at 4033.02,4238.72 h75
  text "Round" at 4356.58,4238.72 h75
  text "-" at 4824.99,4238.72 h75
  text "A" at 2770.84,4228.73 h69.05
  text "72" at 3175.95,4083.35 h75
  text "20.0mil" at 3591.39,4083.35 h75
  text "NPTH" at 4033.02,4083.35 h75
  text "Round" at 4356.58,4083.35 h75
  text "-" at 4824.99,4083.35 h75
  text "M" at 2770.84,4073.36 h69.05
  text "378" at 3175.95,3927.98 h75
  text "32.0mil" at 3591.39,3927.98 h75
  text "PTH" at 4033.02,3927.98 h75
  text "Round" at 4356.58,3927.98 h75
  text "-" at 4824.99,3927.98 h75
  text "B" at 2770.84,3917.99 h69.05
  text "9" at 3175.95,3772.61 h75
  text "32.0mil" at 3591.39,3772.61 h75
  text "PTH" at 4033.02,3772.61 h75
  text "Slot" at 4356.58,3772.61 h75
  text "65.0mil" at 4824.99,3772.61 h75
  text "H" at 2770.84,3762.62 h69.05
  text "Slot -- Must Be Cut Out" at -2075,3750 h80 r270
  text "6" at 3175.95,3617.24 h75
  text "32.0mil" at 3591.39,3617.24 h75
  text "PTH" at 4033.02,3617.24 h75
  text "Slot" at 4356.58,3617.24 h75
  text "80.0mil" at 4824.99,3617.24 h75
  text "G" at 2770.84,3607.25 h69.05
  text "60" at 3175.95,3461.87 h75
  text "35.0mil" at 3591.39,3461.87 h75
  text "PTH" at 4033.02,3461.87 h75
  text "Round" at 4356.58,3461.87 h75
  text "-" at 4824.99,3461.87 h75
  text "C" at 2770.84,3451.89 h69.05
  text "48" at 3175.95,3306.51 h75
  text "40.0mil" at 3591.39,3306.51 h75
  text "PTH" at 4033.02,3306.51 h75
  text "Round" at 4356.58,3306.51 h75
  text "-" at 4824.99,3306.51 h75
  text "D" at 2770.84,3296.52 h69.05
  text "12" at 3175.95,3151.14 h75
  text "40.0mil" at 3591.39,3151.14 h75
  text "PTH" at 4033.02,3151.14 h75
  text "Slot" at 4356.58,3151.14 h75
  text "84.0mil" at 4824.99,3151.14 h75
  text "K" at 2770.84,3141.15 h69.05
  text "12" at 3175.95,2995.77 h75
  text "120.0mil" at 3591.39,2995.77 h75
  text "PTH" at 4033.02,2995.77 h75
  text "Round" at 4356.58,2995.77 h75
  text "-" at 4824.99,2995.77 h75
  text "E" at 2770.84,2985.78 h69.05
  text "Slot -- Must Be Cut Out" at 2075,2975 h80 r90
  text "6" at 3175.95,2840.4 h75
  text "128.0mil" at 3591.39,2840.4 h75
  text "PTH" at 4033.02,2840.4 h75
  text "Round" at 4356.58,2840.4 h75
  text "-" at 4824.99,2840.4 h75
  text "F" at 2770.84,2830.41 h69.05
  text "Slot -- Must Be Cut Out" at -2075,2725 h80 r270
  text "4296 Total" at 3175.95,2685.03 h75
  text "Slot definitions :" at 2800.72,2576.27 h75
  text "Routed Path Length" at 3363.74,2576.27 h75
  text "= Calculated from tool start centre position to tool end centre position." at 4038.14,2576.27 h75
  text "Hole Length" at 3363.74,2514.12 h75
  text "= Routed Path Length + Tool Size = Slot length as defined in the PCB layout" at 3788.47,2514.12 h75
  text "Notes:" at 2700,2025 h200
  text "Slot -- Must Be Cut Out" at 2075,1950 h80 r90
  text "1." at 2775,1875 h110
  text "Except as authorized below," at 2925,1875 h110
  text "DO NOT MODIFY ANY" at 4275,1875 h150
  text "GERBER DATA WITHOUT CUSTOMER APPROVAL." at 3025,1750 h150
  text "2." at 2775,1600 h110
  text "The following changes to the Gerber data are authorized:" at 2925,1600 h110
  text "Top & Bottom silk screen can be clipped or modified to" at 3025,1475 h110
  text "Slot -- Must Be Cut Out" at -425,1400 h80
  text "resolve \"silk screen over pads\" issues." at 3150,1375 h110
  text "Copper width can be adjusted for over-etch or impedance control." at 3025,1250 h110
  text "Required vendor markings and date codes can be added." at 3025,1125 h110
  text "Thieving patterns can be added to the" at 3025,1000 h110
  text "RAIL AREAS ONLY" at 4825,1000 h150
  text "Slot -- Must Be Cut Out" at -2075,925 h80 r270
  text "3." at 2775,850 h110
  text "The array consists of 3 identical boards." at 2925,850 h110
  text "4." at 2775,700 h110
  text "The board must be individually marked with Vendor ID, Date Code," at 2925,700 h110
  text "UL 94V-0 Cert and any other relevant vendor data." at 3025,575 h110
  text "5." at 2775,425 h110
  text "Unless specified otherwise, all dimensions are in inches." at 2925,425 h110
  text "_" at 5066,290 h110
  text "6." at 2775,275 h110
  text "Unless specified otherwise, all tolerances are +0.005, except:" at 2925,275 h110
  text "_" at 3925,165 h110
  text "Slot -- Must Be Cut Out" at 2075,150 h80 r90
  text "Hole diameters are +0.003 for holes larger than 0.020" at 3025,150 h110
  text "Hole diameters are +0.003 -dia. for holes 0.020 and smaller." at 3025,25 h110
  text "Slot -- Must Be Cut Out" at -2075,-100 h80 r270
  text "7." at 2775,-125 h110
  text "All holes of diameter 0.019 and greater MUST remain open. Smaller" at 2925,-125 h110
  text "holes must be plugged with non-conductive via fill and plated over." at 3000,-250 h110
  text "8." at 2775,-400 h110
  text "Material: FR4 (170TG)" at 2925,-400 h110
  text "9." at 2775,-550 h110
  text "Finish: ENIG" at 2925,-550 h110
  text "10." at 2725,-700 h110
  text "RoHS Compliant: Yes" at 2925,-700 h110
  text "11." at 2725,-850 h110
  text "Solder Mask: Green LPI" at 2925,-850 h110
  text "Slot -- Must Be Cut Out" at 2075,-875 h80 r90
  text "12." at 2725,-1000 h110
  text "Silk Screen: White" at 2925,-1000 h110
  text "13." at 2725,-1150 h110
  text "Board must be fabricated to IPC-6012B Class 2." at 2925,-1150 h110
  text "14." at 2725,-1300 h110
  text "Vendor and process must be UL 94V-0 approved." at 2925,-1300 h110
  text "Slot -- Must Be Cut Out" at -425,-1450 h80
  text "15." at 2725,-1450 h110
  text "See separate Stackup Drawing for layer stackup and board thickness." at 2925,-1450 h110
  text "16." at 2735,-1600 h110
  text "The board uses via-in-pad (see note 7)." at 2925,-1600 h110
  text "Slot -- Must Be Cut Out" at -2075,-1950 h80 r270
  text "Slot -- Must Be Cut Out" at 2075,-2725 h80 r90
  text "Slot -- Must Be Cut Out" at -2075,-2975 h80 r270
  text "Slot -- Must Be Cut Out" at 2075,-3750 h80 r90
  text "Slot -- Must Be Cut Out" at -425,-4300 h80
  text "Title:" at 2775,-4625 h100
  text "Johns Hopkins University" at 4725,-4675 h150
  text "IEEE-1394/Ethernet FPGA" at 2875,-4750 h150
  text "Laboratory for Computational" at 4800,-4800 h100
  text "Sensing and Robotics" at 4800,-4900 h100
  text "Date:" at 2775,-4915 h100
  text ".Print_Date" at 3050,-4915 h100
  text "Rev:" at 4150,-4915 h100
  text "3.1" at 4425,-4915 h100
  text "File:" at 2775,-5050 h100
  text ".Pcb_File_Name_No_Path" at 3050,-5050 h100
  text "Sheet 1 of 1" at 5875,-5050 h100

## Dimensions
-2550,-4750 to -2550,4750 on Drill Drawing
-2500,-4800 to 2500,-4800 on Drill Drawing

## Panel: embedded boards
"..\FPGA3.PcbDoc" at 0,-2800, 3 rows x 1 columns, spacing 2850 x 1500, rotation 0